# Altium PCB PCB_Montree_Going.PcbDoc
Units mm, origin at the board's own origin, x right, y up, seen from the top; angles counter-clockwise.
Board outline 70.1 x 70.99 mm, 2 copper layers (Top Layer, Bottom Layer); 43 components, 26 nets, 141 pads, 442 vias.
Unrouted connection lines stored in the file: 3.
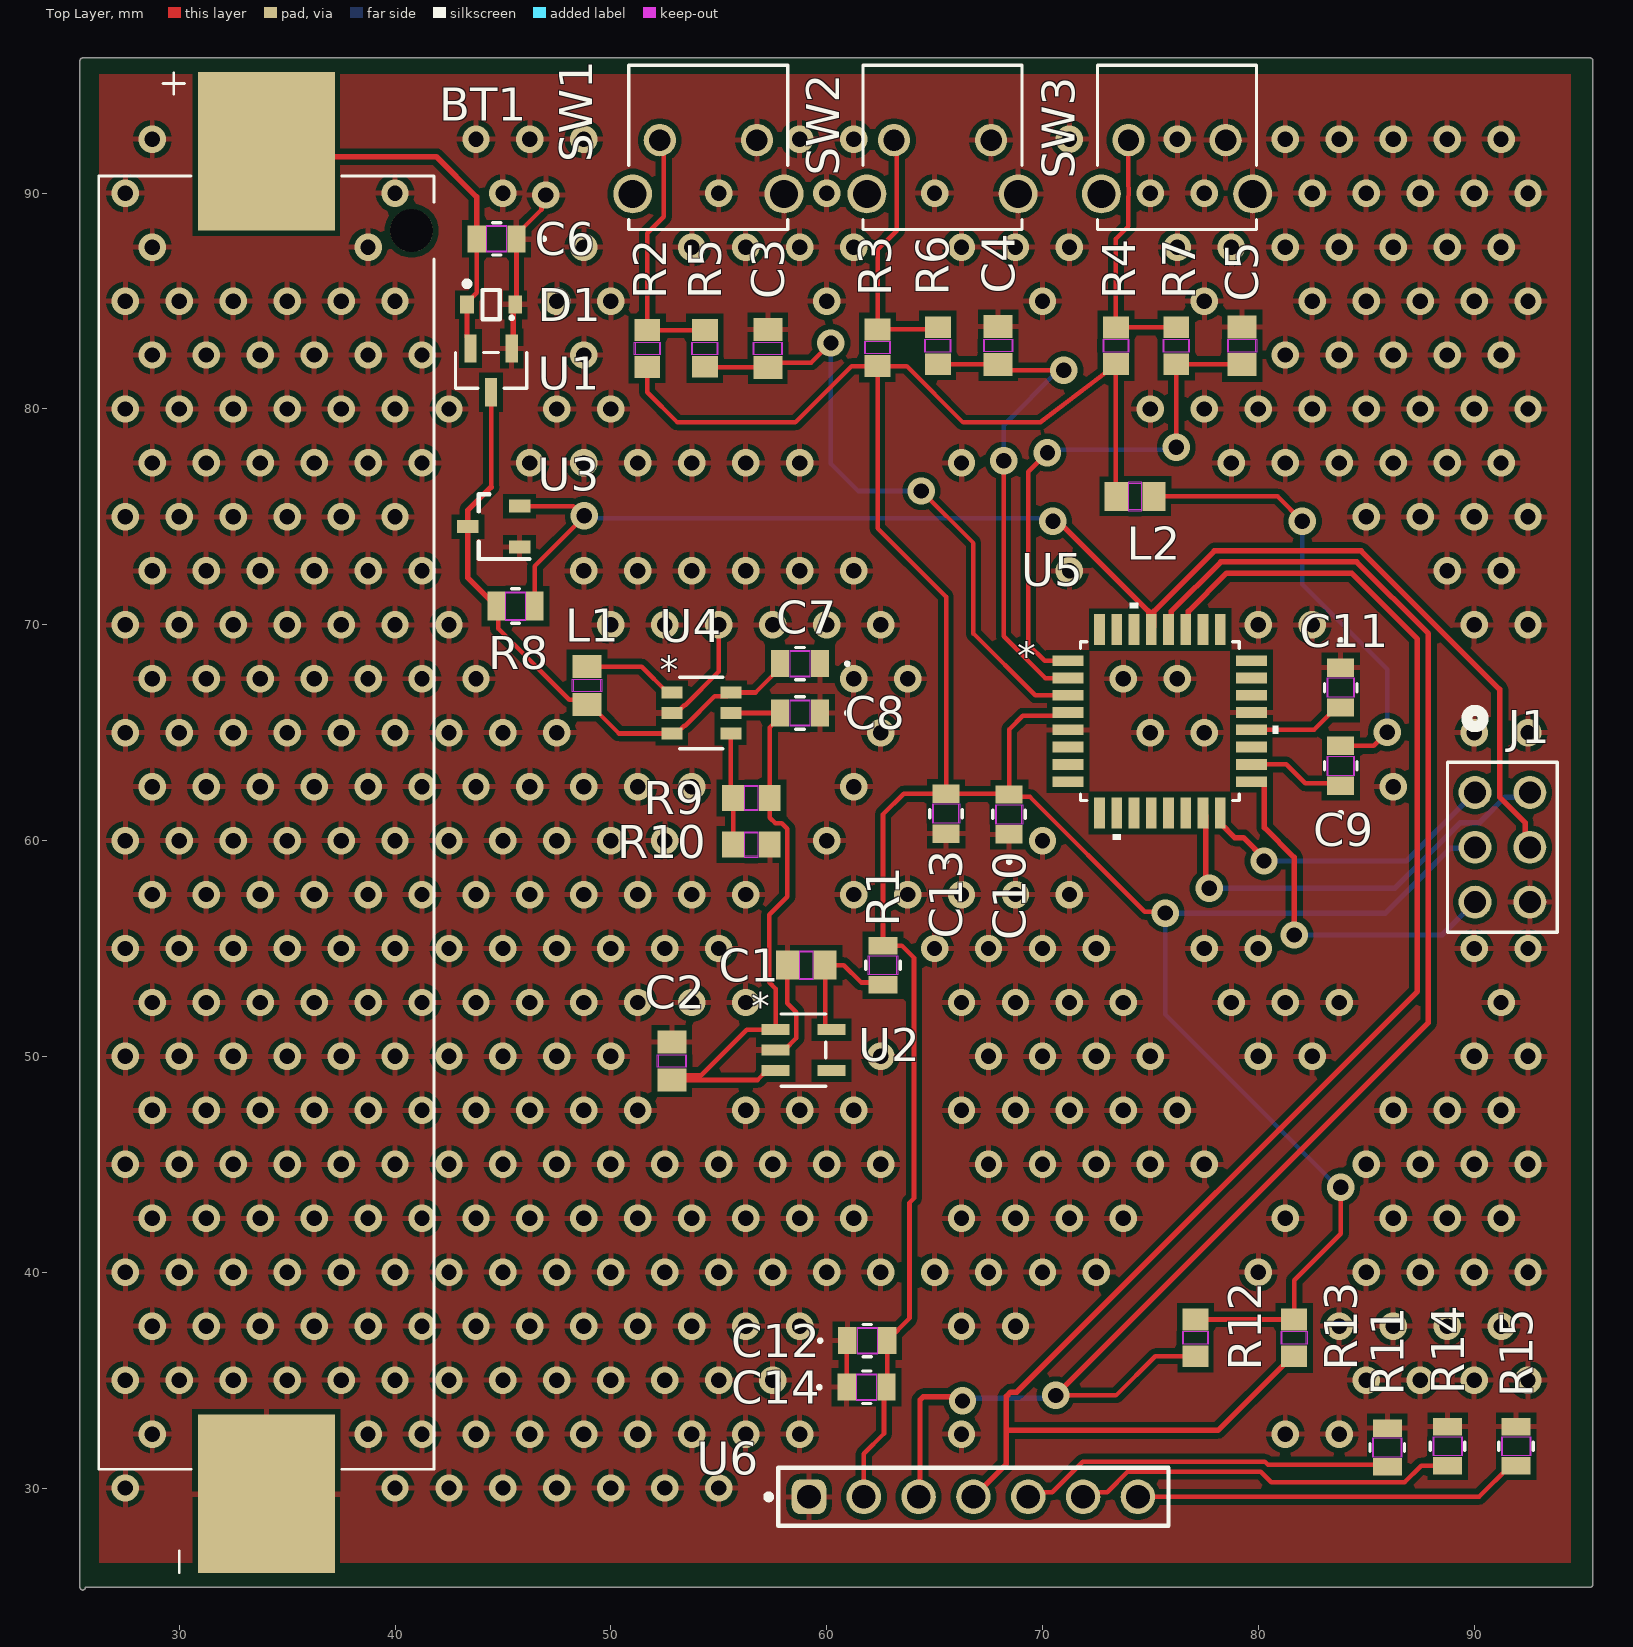
[diagram p0: Top Layer view]
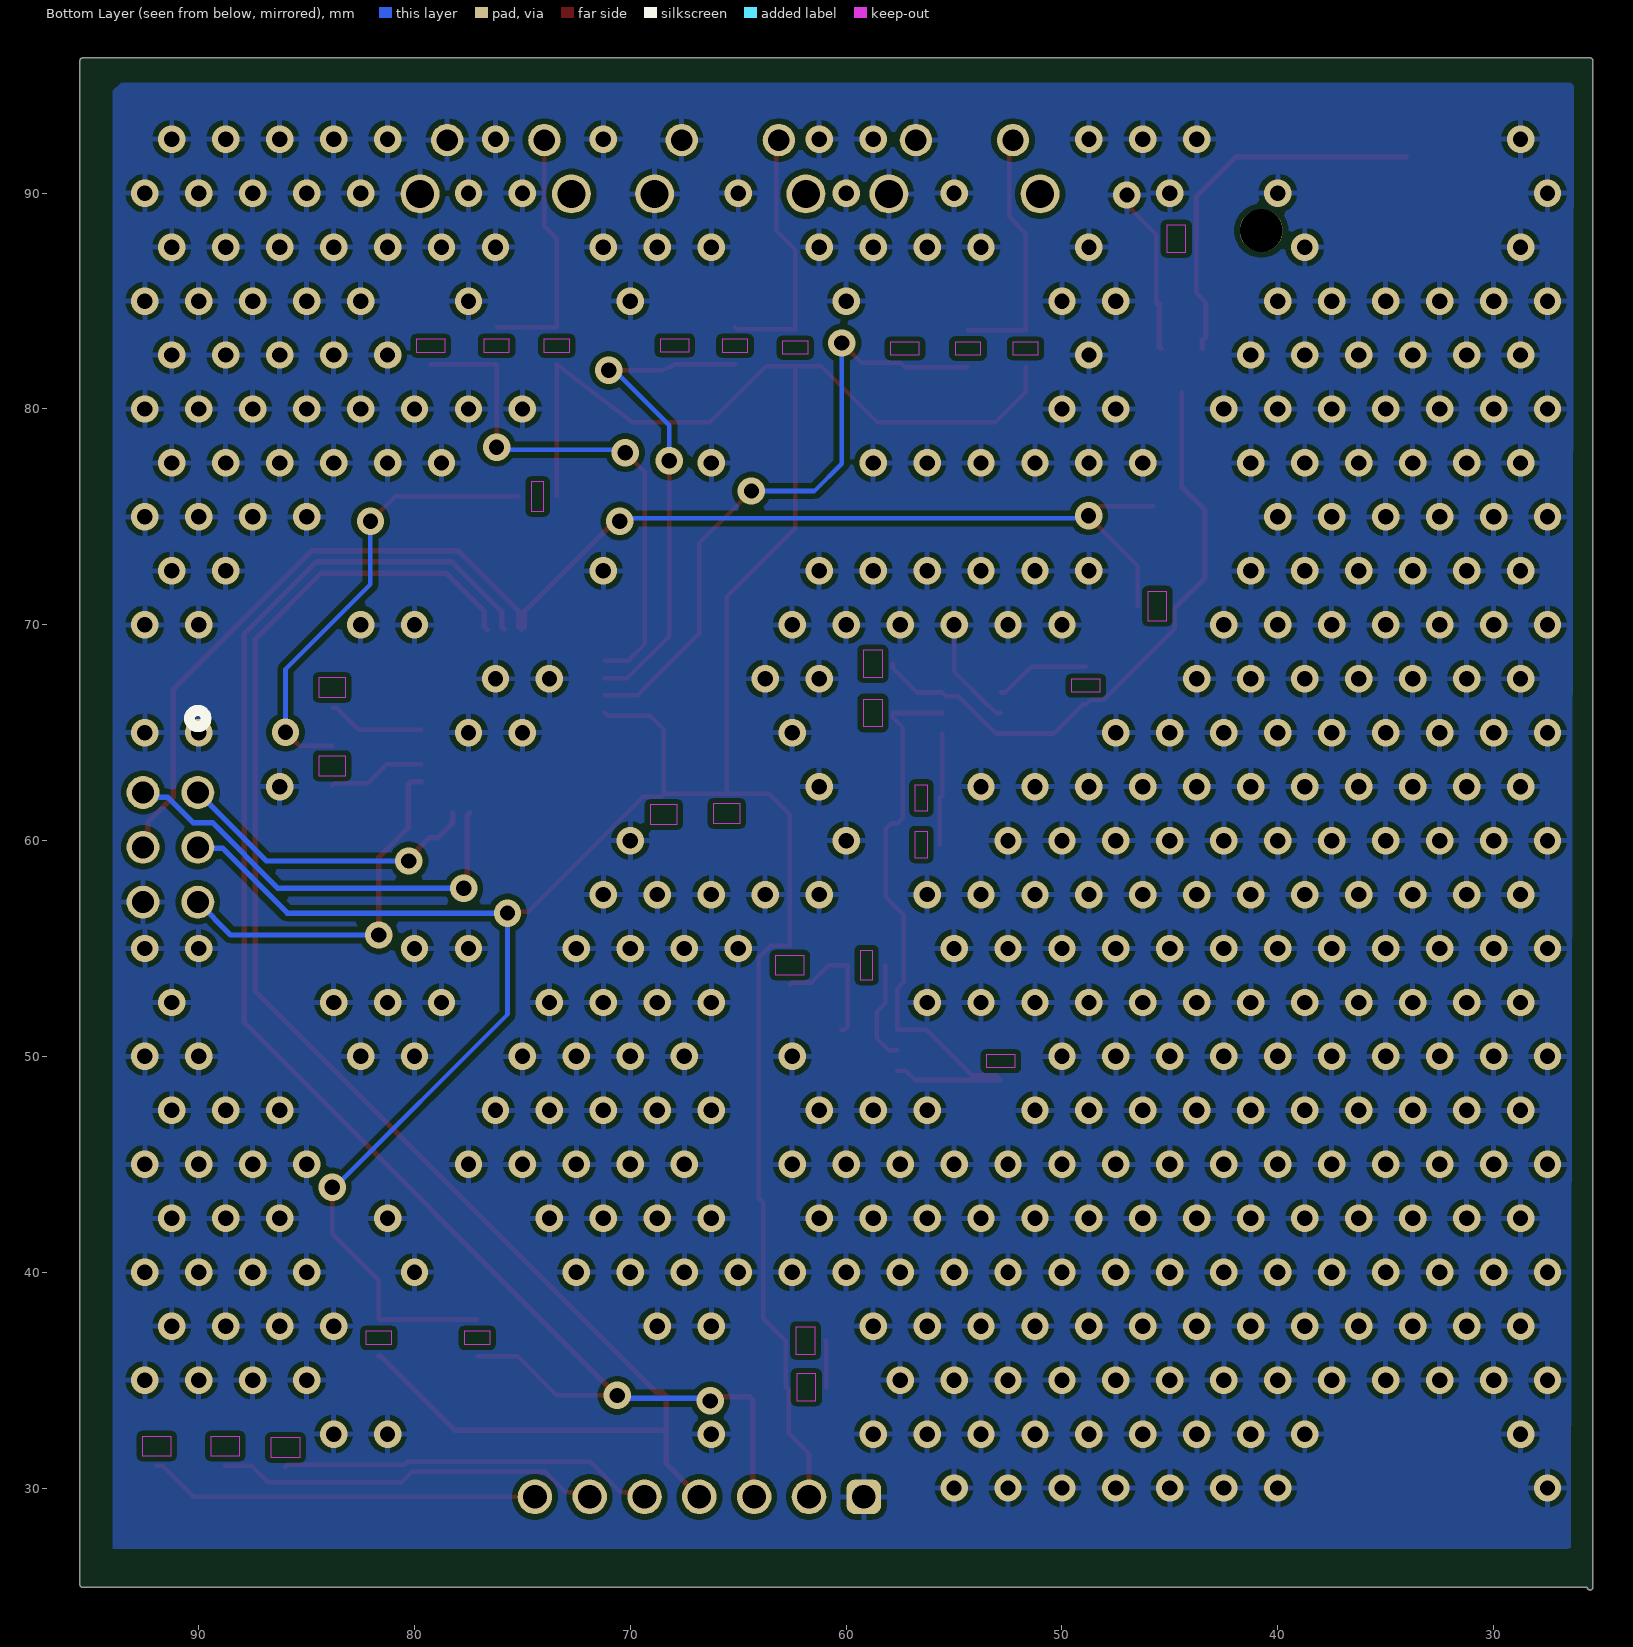
[diagram p1: Bottom Layer view, seen from below]
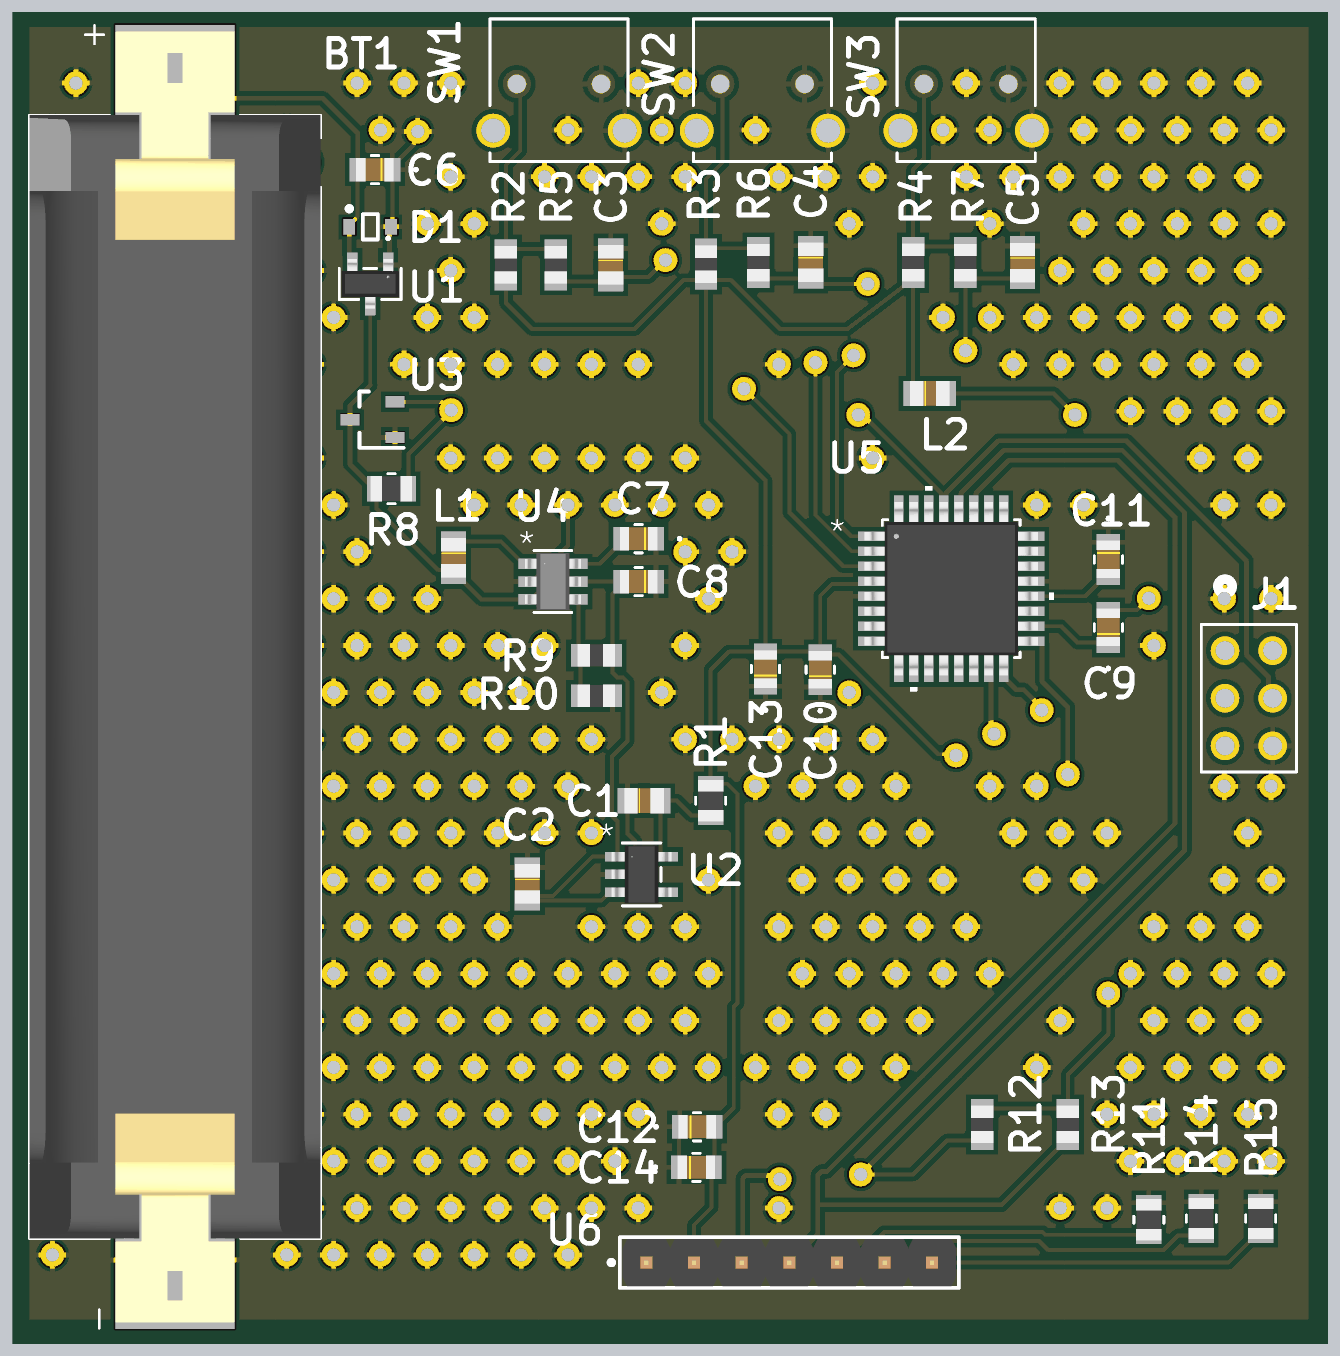
[diagram p2: 3D render of the assembled board from above, using the file's embedded part models]

## Layer stack, top to bottom
Top Solder: solder mask 0.0102, Solder Resist, Dk 3.5
Top Layer: signal copper 0.0356
Dielectric 1: dielectric 0.32, FR-4, Dk 4.8
Bottom Layer: signal copper 0.0356
Bottom Solder: solder mask 0.0102, Solder Resist, Dk 3.5

## Board outline
25.4,25.4 25.4,96.139 cw(c25.527,96.139) 25.527,96.266 95.377,96.266 cw(c95.377,96.139) 95.504,96.139 95.504,25.527 cw(c95.377,25.527) 95.377,25.4 25.654,25.4 cw(c25.527,25.4)

## Design rules (kind name [scope] priority, off if disabled: settings)
Clearance ClearanceExcludeKeepOut [IsPad vs IsKeepout] p1: gap=0 ignorepadtopadclearanceinfootprint=TRUE
Clearance [All] p2: gap=0.254 ignorepadtopadclearanceinfootprint=TRUE except(0.2: Arc-SMDPad Track-SMDPad SMDPad-SMDPad)
ComponentClearance [All] p1: gap=0.254 collisioncheckmode=3 verticalgap=0.254 showdistances=TRUE
DiffPairsRouting [All] p1: maxlimit=0.3 minlimit=0.3 mostfreqgap=0.3 toplayer_minwidth=0.381 toplayer_maxwidth=0.381 toplayer_prefwidth=0.381 bottomlayer_minwidth=0.381 bottomlayer_maxwidth=0.381 bottomlayer_prefwidth=0.381 maxuncoupledlength=12.7
MinimumSolderMaskSliver [All] p1: minsoldermaskwidth=0.045
PolygonConnect [All] p1: connectstyle=Relief reliefconductorwidth=0.254 reliefentries=4 polygonreliefangle="90 Angle" airgapwidth=0.254
RoutingVias [All] p1: holewidth=0.711 width=1.27 viastyle="Through Hole" minholewidth=0.711 minwidth=1.27 maxholewidth=0.711 maxwidth=1.27
SolderMaskExpansion [All] p1: expansion=0.102 istentingtop=FALSE
SupplyNets "Schematic Supply Nets_1" [InNet('GND')] p1: voltage=0.000
SupplyNets "Schematic Supply Nets_4" [InNet('3.6V')] p2: voltage=0.000
SupplyNets "Schematic Supply Nets_3" [InNet('3.3V')] p3: voltage=0.000
SupplyNets "Schematic Supply Nets" [InNet('1.6V')] p4: voltage=0.000
Width [All] p1: maxlimit=0.354 minlimit=0.2 preferedwidth=0.21 minimp=50.000000 maximp=50.000000 favimp=50.000000
27 further rules are at their usual default settings.

## Components (designator, comment, footprint, x,y, rotation, side; value= is the part's Value field where it differs from the comment)
BT1 "1024" BAT_1024 34.036,60.833 r270 top
C1 "1uF" CAP_CL21B105KAFNNNE_SAM 59.055,54.229 r0 top
C2 "1uF" CAP_CL21B105KAFNNNE_SAM 52.832,49.784 r270 top
C3 "1uF" CAP_CL21B105KAFNNNE_SAM 57.277,82.804 r270 top
C4 "1uF" CAP_CL21B105KAFNNNE_SAM 67.945,82.944 r270 top
C5 "1uF" CAP_CL21B105KAFNNNE_SAM 79.248,82.931 r270 top
C6 "0.1uF" CAP_CL21_SAM 44.704,87.884 r180 top
C7 "10uF" CAP_CL21_SAM 58.765,68.199 r180 top
C8 "10uF" CAP_CL21_SAM 58.765,65.913 r180 top
C9 "0.1uF" CAP_CL21_SAM 83.82,63.464 r90 top
C10 "0.1uF" CAP_CL21_SAM 68.453,61.214 r90 top
C11 "0.1uF" CAP_CL21_SAM 83.82,67.092 r270 top
C12 "10uF" CAP_CL21_SAM 61.885,36.83 r0 top
C13 "0.1uF" CAP_CL21_SAM 65.532,61.25 r90 top
C14 "0.1uF" CAP_CL21_SAM 61.849,34.671 r0 top
D1 "MM3Z3V3T1G" ONSC-SOD-323-2-477-02_V 44.45,84.836 r0 top
J1 "67997-206HLF" 6Pins_AMP 90.043,62.23 r270 top
L1 "Inductor" CAP_CL21B105KAFNNNE_SAM 48.895,67.183 r270 top value=2.2uH
L2 "Inductor" CAP_CL21B105KAFNNNE_SAM 74.295,75.946 r0 top value=10uH
R1 "0" STA_RMCF0805_STP 62.611,54.229 r90 top
R2 "10k" RC0805N_YAG 51.689,82.804 r90 top
R3 "10k" RC0805N_YAG 62.357,82.842 r90 top
R4 "10k" RC0805N_YAG 73.406,82.931 r90 top
R5 "5k" RC0805N_VIS 54.356,82.804 r90 top
R6 "5k" RC0805N_VIS 65.151,82.931 r90 top
R7 "5k" RC0805N_VIS 76.2,82.931 r90 top
R8 "0" STA_RMCF0805_STP 45.582,70.866 r0 top
R9 "70k" RC0805N_VIS 56.515,61.976 r180 top
R10 "50k" RC0805N_VIS 56.515,59.817 r0 top
R11 "0" STA_RMCF0805_STP 85.979,31.877 r90 top
R12 "4.7k" RC0805N_VIS 77.089,36.957 r270 top
R13 "4.7k" RC0805N_VIS 81.661,36.957 r270 top
R14 "0" STA_RMCF0805_STP 88.773,31.941 r90 top
R15 "0" STA_RMCF0805_STP 91.948,31.941 r90 top
SW1 "1-1825027-7" SW2_1825027-F_TEC 56.769,92.456 r180 top
SW2 "1-1825027-7" SW2_1825027-F_TEC 67.619,92.456 r180 top
SW3 "1-1825027-7" SW2_1825027-F_TEC 78.486,92.456 r180 top
U1 "NTR4101PT1G" SOT-23-3_1P4X3P040_ONS 44.45,81.788 r180 top
U2 "MIC5504-3.3YM5-TR" SOT-23-5_MC_MCH 58.928,50.292 r0 top
U3 "TPS3839G12DBZR" DBZ0003A_N 44.577,74.549 r180 top
U4 "TLV61070ADBVR" SOT-23-6_DBV_TEX 54.194,65.913 r0 top
U5 "ATMEGA328PB-AU" 32A_MCH 75.438,65.532 r0 top
U6 "" 61300711121 66.802,29.591 r0 top

## Footprints (in the part's own frame and the unit in brackets; to place one, negate y for a bottom-side part, rotate by r counter-clockwise, add the part's x,y. Pads: shape width x height; smd on the part's side, far side on the other; paste and mask are expansions set on the pad)
6Pins_AMP [mil]
  round 60 hole 40 paste-99999 mask+0: 1(0,0) 2(100,0) 3(200,0) 4(0,100) 5(100,100) 6(200,100)
  silkscreen extent -150,-50 255,150
32A_MCH [mm]
  rect 1.45x0.5 smd paste+0 mask+0: 1(-4.25,2.8) 2(-4.25,2) 3(-4.25,1.2) 4(-4.25,0.4) 5(-4.25,-0.4) 6(-4.25,-1.2) 7(-4.25,-2) 8(-4.25,-2.8) 17(4.25,-2.8) 18(4.25,-2) 19(4.25,-1.2) 20(4.25,-0.4) 21(4.25,0.4) 22(4.25,1.2) 23(4.25,2) 24(4.25,2.8)
  rect 0.5x1.45 smd paste+0 mask+0: 9(-2.8,-4.25) 10(-2,-4.25) 11(-1.2,-4.25) 12(-0.4,-4.25) 13(0.4,-4.25) 14(1.2,-4.25) 15(2,-4.25) 16(2.8,-4.25) 25(2.8,4.25) 26(2,4.25) 27(1.2,4.25) 28(0.4,4.25) 29(-0.4,4.25) 30(-1.2,4.25) 31(-2,4.25) 32(-2.8,4.25)
  silkscreen extent -3.68,-5.48 5.48,5.48, body extent -4.62,-4.62 4.62,4.62, height 1.2
61300711121 [mm] "Pin Header, pitch 2.54 mm, THT, Vertical, single row, 7p"
  rrect50% 1.6x1.6 hole 1.1: 1(-7.62,0)
  round 1.6 hole 1.1: 2(-5.08,0) 3(-2.54,0) 4(0,0) 5(2.54,0) 6(5.08,0) 7(7.62,0)
  silkscreen extent -9.61,-1.35 9.04,1.35, body extent -8.89,-1.27 8.89,1.27, height 8.57
BAT_1024 [mm]
  rect 7.34x6.35 smd: N(31.105,0) P(-31.105,0)
  round 1.98 hole 1.98 unplated: ""(-27.435,6.73)
  silkscreen extent -34.75,-7.77 34.75,7.77, body extent -34.43,-7.77 34.43,7.77, height 14.86
CAP_CL21_SAM [mm]
  rect 0.85x1.25 smd paste+0 mask+0: 1(-0.925,0) 2(0.925,0)
  Top Layer keep-out region: -0.449,-0.574 -0.449,0.574 0.449,0.574 0.449,-0.574
  Keep-Out Layer region: -0.449,-0.625 -0.449,0.625 0.449,0.625 0.449,-0.625
  silkscreen extent -2.26,-0.75 0.19,0.75, body extent -1,-0.63 1,0.63, height 1.35
CAP_CL21B105KAFNNNE_SAM [mil]
  rect 42x53 smd paste+0 mask+0: 1(-34.5,0) 2(34.5,0)
  Top Layer keep-out region: -11.5,-24.5 -11.5,24.5 11.5,24.5 11.5,-24.5
  Keep-Out Layer region: -11.5,-26.5 -11.5,26.5 11.5,26.5 11.5,-26.5
  body extent -41,-26 41,26, height 53
DBZ0003A_N [mm]
  rect 1x0.6 smd paste+0 mask+0.051: 1(-1.2,0.95) 2(-1.2,-0.95) 3(1.2,0)
  silkscreen extent -1.65,-1.5 0.7,1.5
ONSC-SOD-323-2-477-02_V [mm] "SOD, 2-Leads, Body 1.7x1.25mm"
  rect 0.63x0.83 smd: 1(-1.115,0) 2(1.115,0)
  silkscreen extent -1.24,-0.67 0.4,1.09, body extent -0.85,-0.63 0.85,0.63, height 1.06
RC0805N_VIS [mm]
  rect 1.006x1.2 smd paste+0 mask+0: 1(-0.853,0) 2(0.853,0)
  Top Layer keep-out region: -0.299,-0.549 -0.299,0.549 0.299,0.549 0.299,-0.549
  Keep-Out Layer region: -0.299,-0.6 -0.299,0.6 0.299,0.6 0.299,-0.6
  body extent -1,-0.6 1,0.6, height 0.71
RC0805N_YAG [mil]
  rect 40x47 smd paste+0 mask+0: 1(-33.5,0) 2(33.5,0)
  Top Layer keep-out region: -11.5,-21.5 -11.5,21.5 11.5,21.5 11.5,-21.5
  Keep-Out Layer region: -11.5,-23.5 -11.5,23.5 11.5,23.5 11.5,-23.5
  body extent -39,-24 39,24, height 28
SOT-23-3_1P4X3P040_ONS [mil]
  rect 22.36x51.56 smd paste+0 mask+0: 1(-37.5,-40) 2(37.5,-40) 3(0,40)
  silkscreen extent -65,-99 65,33, body extent -60,-52 60,52, height 44
SOT-23-5_MC_MCH [mil]
  rect 51.56x20 smd paste+0 mask+0: 1(-51,37.4) 2(-51,0) 3(-51,-37.4) 4(51,-37.4) 5(51,37.4)
  silkscreen extent -40,-66 40,66, body extent -63,-61 63,61, height 57
SOT-23-6_DBV_TEX [mm]
  rect 0.972x0.558 smd paste+0 mask+0: 1(-1.362,0.95) 2(-1.362,0) 3(-1.362,-0.95) 4(1.362,-0.95) 5(1.362,0) 6(1.362,0.95)
  silkscreen extent -1,-1.65 1,1.65, body extent -1.5,-1.52 1.5,1.52, height 1.45
STA_RMCF0805_STP [mil]
  rect 31.87x53 smd paste+0 mask+0: 1(-35.44,0) 2(35.44,0)
  Top Layer keep-out region: -17.5,-24.5 -17.5,24.5 17.5,24.5 17.5,-24.5
  Keep-Out Layer region: -17.5,-26.5 -17.5,26.5 17.5,26.5 17.5,-26.5
  silkscreen extent -7,-32 7,32, body extent -44,-26 44,26, height 26
SW2_1825027-F_TEC [mil]
  round 59 / inner round 60 / far side round 59 hole 39 paste-99999 mask-29.5: 1(0,0) 2(177.17,0)
  round 71 / inner round 60 / far side round 71 hole 51 paste-99999 mask+0: 3(-49.41,98.04) 4(226.58,98.04)
  silkscreen extent -56,-137 234,163

## Part data
BT1: "SMT Holder for AA Battery", Package=None, Check_prices=https://www.snapeda.com/parts/1024/Keystone/view-part/?ref=eda, MF="Keystone Electronics", MP=1024, SnapEDA_Link=https://www.snapeda.com/parts/1024/Keystone/view-part/?ref=snap
C1 C2 C3 C4 C5: library part CL21B105KAFNNNE, "Description", Manufacturer_Name=Samsung, Copyright="Copyright (C) 2025 Ultra Librarian. All rights reserved.", Manufacturer_Part_Number=CL21B105KAFNNNE
C6 C9 C10 C11 C13 C14: library part CL21B104KBCNNNC, "Description", Manufacturer_Name=Samsung, Copyright="Copyright (C) 2026 Ultra Librarian. All rights reserved.", Manufacturer_Part_Number=CL21B104KBCNNNC
C7 C8 C12: library part CL21A106KQFNNNE, "Description", Manufacturer_Name=Samsung, Copyright="Copyright (C) 2026 Ultra Librarian. All rights reserved.", Manufacturer_Part_Number=CL21A106KQFNNNE
D1: library part CMP-1060-00672-1, "Zener Voltage Regulator, 300 mW, 2-Pin SOD-323, Pb-Free, Tape and Reel", Manufacturer="On Semiconductor", ComponentLink1Description="Manufacturer URL", ComponentLink1URL=http://www.onsemi.com/, ComponentLink2Description=Datasheet, ComponentLink2URL=http://www.onsemi.cn/pub_link/Collateral/MM3Z2V4T1-D.PDF, ComponentLink3Description="Package Specification", ComponentLink3URL=http://www.onsemi.com/pub_link/Collateral/477-02.PDF.1, DatasheetVersion="Rev. 9", Mounting Technology="Surface Mount", P Max (W)=0.3, PackageDescription="2-Pin SOD, Body 1.7 x 1.25 mm", PackageReference=SOD-323-2-477-02, PackageVersion="Rev. H, 03/2007", Packing="Tape and Reel", PartNumber=MM3Z3V3T1G, RoHS=Pb-Free, VZ Typ (V)=3.3
J1: "Description", Manufacturer_Name="Amphenol ICC", Copyright="Copyright (C) 2026 Ultra Librarian. All rights reserved.", Manufacturer_Part_Number=67997-206HLF, RefDes=RefDes, Type=Type
R1 R8 R11 R14 R15: library part RMCF0805ZT0R00, "Description", Manufacturer_Name="Stackpole International", Copyright="Copyright (C) 2026 Ultra Librarian. All rights reserved.", Manufacturer_Part_Number=RMCF0805ZT0R00
R2 R3 R4: library part RC0805FR-0710KL, "Description", Manufacturer_Name=Yageo, Copyright="Copyright (C) 2025 Ultra Librarian. All rights reserved.", Manufacturer_Part_Number=RC0805FR-0710KL
R5 R6 R7 R9 R10 R12 R13: library part CRCW080569K8FKEA, "D12/CRCW0805 100 69K8 1% ET1 e3", Manufacturer_Name=Vishay, Copyright="Copyright (C) 2026 Ultra Librarian. All rights reserved.", Manufacturer_Part_Number=CRCW080569K8FKEA
SW1 SW2 SW3: "FSMRA6JH04=R/A,TACT PB SW,160G", Manufacturer_Name="TE Connectivity", Copyright="Copyright (C) 2025 Ultra Librarian. All rights reserved.", Manufacturer_Part_Number=1-1825027-7
U1: "Description", Manufacturer_Name=onsemi, Copyright="Copyright (C) 2025 Ultra Librarian. All rights reserved.", Manufacturer_Part_Number=NTR4101PT1G, RefDes=RefDes, Type=Type
U2 U5: "Description", Manufacturer_Name=Microchip, Copyright="Copyright (C) 2025 Ultra Librarian. All rights reserved.", RefDes=RefDes, Type=Type
  U2: Manufacturer_Part_Number=MIC5504-3.3YM5-TR
  U5: Manufacturer_Part_Number=ATMEGA328PB-AU
U3: "Ultra-low power, supply voltage supervisor 3-SOT-23 -40 to 85", Manufacturer_Name="Texas Instruments", Copyright="Copyright (C) 2026 Ultra Librarian. All rights reserved.", Datasheet=https://www.ti.com/lit/gpn/tps3839, Digi-Key_Part_Number_1=296-40759-1-ND, Digi-Key_Part_Number_2=296-40759-2-ND, Digi-Key_Part_Number_3=296-40759-6-ND, Digi-Key_Part_Number_4=TPS3839G12DBZR-ND, Digi-Key_Part_Number_5=2156-TPS3839G12DBZR-ND, Manufacturer_Part_Number=TPS3839G12DBZR, RefDes=RefDes, Type=TYPE
U4: "5-V 2-A boost converter with 0.5-V minimum input voltage 6-SOT-23 -40 to 125", Manufacturer_Name="Texas Instruments", Copyright="Copyright (C) 2025 Ultra Librarian. All rights reserved.", Manufacturer_Part_Number=TLV61070ADBVR, RefDes=RefDes, Type=Type
U6: library part Component_1
L1 L2: Code_IEC=1005, Code_JEITA=0402, LatestRevisionDate=29-May-2009, LatestRevisionNote="IPC-7351 Footprint Added.", PackageDescription="Chip Inductor", PackageReference=0402-A, Published=8-Jun-2000, Publisher="Altium Limited"

## Via types
v1: diameter 1.27, hole 0.711, Top Layer to Bottom Layer, 442 vias

## Nets (pads, with @x,y where several pads share a name; then routed paths per layer and width w, separated by ;. In a path a pad name is that pad's centre, name@x,y a point inside that pad or via, vN(x,y) a via of type N, cw(c..) or ccw(c..) an arc to the next point about the centre after c; other vN are vias at no path point)
1.6V: C7.2 L1.2 R8.1 U1.3 U3.3 U4.3 U4.6 | length 28.5
  Top Layer w0.21: 44.45,76.384 U1.3 ; R8.1 44.778,70.769 44.778,69.827 48.073,66.532 48.67,66.532 L1.2 49.035,66.307 50.378,64.963 U4.3 53.039,64.963 53.405,65.329 53.444,65.329 54.804,66.689 55.383,66.689 U4.6 56.704,66.863 57.84,67.999 C7.2
  Top Layer w0.254: 44.45,76.384 43.377,75.311 U3.3 43.377,72.171 R8.1
3.3V: C10.2 C12.2 C13.2 C14.2 J1.2 L2.1 R1.2 R2.1 R3.1 R4.1 R12.1 R13.1 U5.4 U6.2 | length 152.7
  Top Layer w0.21: R2.1 51.689,80.772 53.086,79.375 58.547,79.375 61.163,81.991 R3.1 ; U6.2 61.722,31.591 62.657,32.527 62.657,34.554 C14.2 62.81,34.707 C12.2 63.839,37.86 63.839,43.223 64.048,43.432 64.048,54.57 63.489,55.129 R1.2 62.611,61.214 63.572,62.175 C13.2 ; C10.2@68.453,62.175 68.453,65.151 69.089,65.787 71.043,65.787 U5.4 ; L2.1 73.406,75.959 R4.1 72.914,81.677 69.89,79.375 66.32,79.375 63.704,81.991 R3.1 ; v1(75.692,56.642) 75.631,56.703 74.742,56.703 69.423,62.022 68.57,62.022 C10.2 68.417,62.175 C13.2 ; R12.1 R13.1 81.661,39.624 83.82,41.783 v1(83.82,43.942) ; R3.1 62.357,74.478 65.532,71.303 C13.2
  Bottom Layer w0.21: v1(75.692,56.642) 75.692,51.943 83.693,43.942 v1(83.82,43.942)
  Bottom Layer w0.254: v1(75.692,56.642) 85.892,56.642 88.9,59.65 89.872,59.65 89.938,59.585 J1.2
3.6V: C2.2 C8.2 R9.1 U2.1 U2.3 U4.5 | length 28.9
  Top Layer w0.21: U4.5 C8.2 57.84,65.713 57.368,65.241 R9.1 57.368,61.061 57.627,60.802 57.917,60.802 58.176,60.543 58.176,57.404 57.34,56.569 57.34,53.43 57.633,53.137 U2.1 56.296,51.242 54.187,49.133 53.057,49.133 C2.2 56.798,48.908 57.232,49.342 U2.3
Bouton_1: C3.2 R5.1 U5.3 | length 29.8
  Top Layer w0.21: R5.1 54.38,81.928 C3.2 57.502,82.153 59.293,82.153 v1(60.198,83.058) ; v1(64.389,76.2) 66.802,73.787 66.802,69.596 69.666,66.732 U5.3
  Bottom Layer w0.21: v1(60.198,83.058) 60.198,77.47 61.468,76.2 v1(64.389,76.2)
Bouton_2: C4.2 R6.1 U5.2 | length 23.3
  Top Layer w0.21: R6.1 67.934,82.078 C4.2 68.513,81.788 v1(70.993,81.788) ; v1(68.199,77.597) 68.199,69.469 70.136,67.532 U5.2
  Bottom Layer w0.21: v1(68.199,77.597) 68.199,79.248 70.739,81.788 v1(70.993,81.788)
Bouton_3: C5.2 R7.1 U5.1 | length 24.4
  Top Layer w0.21: v1(70.231,77.978) 69.342,77.089 69.342,69.088 70.098,68.332 U5.1 ; v1(76.2,78.232) R7.1 79.224,82.078 C5.2
  Bottom Layer w0.21: v1(70.231,77.978) 70.358,78.105 76.073,78.105 v1(76.2,78.232)
GND: BT1.N C1.1 C2.1 C3.1 C4.1 C5.1 C6.1 C7.1 C8.1 C10.1 C11.1 C12.1 C13.1 C14.1 D1.2 J1.6 R10.2 R11.2 R14.2 R15.2 SW1.1 SW1.3 SW2.1 SW2.3 SW3.1 SW3.3 U1.1 U2.2 U3.1 U4.2 U5.5 U5.21 U6.1 | length 19.8
  Top Layer w0.21: D1.2 45.629,84.9 45.629,88.084 46.787,89.242 46.787,89.713 v1(46.99,89.916) ; U4.2 53.039,65.913 53.405,66.279 53.444,66.279 55,67.835 v1(55,70) ; U2.2 58.033,50.292 58.592,50.851 58.592,52.054 58.179,52.468 C1.1 ; C14.1 60.924,36.794 C12.1
  Top Layer w0.254: U1.1 45.484,82.885 D1.2@45.484,84.882
  other v1: 27.5,30 40,30 42.5,30 45,30 47.5,30 50,30 52.5,30 55,30 28.75,32.5 38.75,32.5 41.25,32.5 43.75,32.5 46.25,32.5 48.75,32.5 51.25,32.5 53.75,32.5 56.25,32.5 58.75,32.5 66.25,32.5 81.25,32.5 83.75,32.5 27.5,35 30,35 32.5,35 35,35 37.5,35 40,35 42.5,35 45,35 47.5,35 50,35 52.5,35 55,35 57.5,35 85,35 87.5,35 90,35 92.5,35 28.75,37.5 31.25,37.5 33.75,37.5 36.25,37.5 38.75,37.5 41.25,37.5 43.75,37.5 46.25,37.5 48.75,37.5 51.25,37.5 53.75,37.5 56.25,37.5 58.75,37.5 66.25,37.5 68.75,37.5 83.75,37.5 86.25,37.5 88.75,37.5 91.25,37.5 27.5,40 30,40 32.5,40 35,40 37.5,40 40,40 42.5,40 45,40 47.5,40 50,40 52.5,40 55,40 57.5,40 60,40 62.5,40 65,40 67.5,40 70,40 72.5,40 80,40 85,40 87.5,40 90,40 92.5,40 28.75,42.5 31.25,42.5 33.75,42.5 36.25,42.5 38.75,42.5 41.25,42.5 43.75,42.5 46.25,42.5 48.75,42.5 51.25,42.5 53.75,42.5 56.25,42.5 58.75,42.5 61.25,42.5 66.25,42.5 68.75,42.5 71.25,42.5 73.75,42.5 81.25,42.5 86.25,42.5 88.75,42.5 91.25,42.5 27.5,45 30,45 32.5,45 35,45 37.5,45 40,45 42.5,45 45,45 47.5,45 50,45 52.5,45 55,45 57.5,45 60,45 62.5,45 67.5,45 70,45 72.5,45 75,45 77.5,45 85,45 87.5,45 90,45 92.5,45 28.75,47.5 31.25,47.5 33.75,47.5 36.25,47.5 38.75,47.5 41.25,47.5 43.75,47.5 46.25,47.5 48.75,47.5 51.25,47.5 56.25,47.5 58.75,47.5 61.25,47.5 66.25,47.5 68.75,47.5 71.25,47.5 73.75,47.5 76.25,47.5 86.25,47.5 88.75,47.5 91.25,47.5 27.5,50 30,50 32.5,50 35,50 37.5,50 40,50 42.5,50 45,50 47.5,50 50,50 62.5,50 67.5,50 70,50 72.5,50 75,50 80,50 82.5,50 90,50 92.5,50 28.75,52.5 31.25,52.5 33.75,52.5 36.25,52.5 38.75,52.5 41.25,52.5 43.75,52.5 46.25,52.5 48.75,52.5 51.25,52.5 53.75,52.5 56.25,52.5 66.25,52.5 68.75,52.5 71.25,52.5 73.75,52.5 78.75,52.5 81.25,52.5 83.75,52.5 91.25,52.5 27.5,55 30,55 32.5,55 35,55 37.5,55 40,55 42.5,55 45,55 47.5,55 50,55 52.5,55 55,55 65,55 67.5,55 70,55 72.5,55 77.5,55 80,55 90,55 92.5,55 28.75,57.5 31.25,57.5 33.75,57.5 36.25,57.5 38.75,57.5 41.25,57.5 43.75,57.5 46.25,57.5 48.75,57.5 51.25,57.5 53.75,57.5 56.25,57.5 61.25,57.5 63.75,57.5 66.25,57.5 68.75,57.5 71.25,57.5 27.5,60 30,60 32.5,60 35,60 37.5,60 40,60 42.5,60 45,60 47.5,60 50,60 52.5,60 60,60 70,60 28.75,62.5 31.25,62.5 33.75,62.5 36.25,62.5 38.75,62.5 41.25,62.5 43.75,62.5 46.25,62.5 48.75,62.5 51.25,62.5 53.75,62.5 61.25,62.5 86.25,62.5 27.5,65 30,65 32.5,65 35,65 37.5,65 40,65 42.5,65 45,65 47.5,65 62.5,65 75,65 77.5,65 90,65 92.5,65 28.75,67.5 31.25,67.5 33.75,67.5 36.25,67.5 38.75,67.5 41.25,67.5 43.75,67.5 61.25,67.5 63.75,67.5 73.75,67.5 76.25,67.5 27.5,70 30,70 32.5,70 35,70 37.5,70 40,70 42.5,70 50,70 52.5,70 57.5,70 60,70 62.5,70 80,70 82.5,70 90,70 92.5,70 28.75,72.5 31.25,72.5 33.75,72.5 36.25,72.5 38.75,72.5 41.25,72.5 48.75,72.5 51.25,72.5 53.75,72.5 56.25,72.5 58.75,72.5 61.25,72.5 71.25,72.5 88.75,72.5 91.25,72.5 27.5,75 30,75 32.5,75 35,75 37.5,75 40,75 85,75 87.5,75 90,75 92.5,75 28.75,77.5 31.25,77.5 33.75,77.5 36.25,77.5 38.75,77.5 41.25,77.5 46.25,77.5 48.75,77.5 51.25,77.5 53.75,77.5 56.25,77.5 58.75,77.5 66.25,77.5 78.75,77.5 81.25,77.5 83.75,77.5 86.25,77.5 88.75,77.5 91.25,77.5 27.5,80 30,80 32.5,80 35,80 37.5,80 40,80 42.5,80 47.5,80 50,80 75,80 77.5,80 80,80 82.5,80 85,80 87.5,80 90,80 92.5,80 28.75,82.5 31.25,82.5 33.75,82.5 36.25,82.5 38.75,82.5 41.25,82.5 48.75,82.5 81.25,82.5 83.75,82.5 86.25,82.5 88.75,82.5 91.25,82.5 27.5,85 30,85 32.5,85 35,85 37.5,85 40,85 47.5,85 50,85 60,85 70,85 77.5,85 82.5,85 85,85 87.5,85 90,85 92.5,85 28.75,87.5 38.75,87.5 48.75,87.5 53.75,87.5 56.25,87.5 58.75,87.5 61.25,87.5 66.25,87.5 68.75,87.5 71.25,87.5 76.25,87.5 78.75,87.5 81.25,87.5 83.75,87.5 86.25,87.5 88.75,87.5 91.25,87.5 27.5,90 40,90 45,90 55,90 60,90 65,90 75,90 77.5,90 82.5,90 85,90 87.5,90 90,90 92.5,90 28.75,92.5 43.75,92.5 46.25,92.5 48.75,92.5 58.75,92.5 61.25,92.5 71.25,92.5 76.25,92.5 81.25,92.5 83.75,92.5 86.25,92.5 88.75,92.5 91.25,92.5
MISO: J1.1 U5.16 | length 14.4
  Top Layer w0.254: U5.16 78.238,60.807 78.907,60.138 79.308,60.138 80.264,59.182 v1(80.264,59.055)
  Bottom Layer w0.254: v1(80.264,59.055) 86.868,59.055 J1.1
MOSI: J1.4 U5.15 | length 20.3
  Top Layer w0.254: U5.15 77.561,61.159 77.561,57.948 v1(77.724,57.785)
  Bottom Layer w0.254: v1(77.724,57.785) 86.316,57.785 89.364,60.833 90.262,60.833 91.44,62.011 92.364,62.011 J1.4
NetBT1_P: BT1.P C6.2 D1.1 U1.2 | length 17.8
  Top Layer w0.21: D1.1 43.335,84.936 43.779,85.38 C6.2
  Top Layer w0.254: BT1.P@34.036,91.694 41.91,91.694 43.779,89.825 C6.2 ; D1.1 43.335,83.337 43.497,83.175 U1.2
NetC1_2: C1.2 R1.1 U2.5 | length 6.2
  Top Layer w0.21: U2.5 60.08,51.242 59.931,51.391 C1.2 60.8,54.229 61.603,53.425 62.514,53.425 R1.1
NetC9_1: C9.1 U5.18 | length 4.5
  Top Layer w0.21: U5.18 81.293,63.532 82.17,62.656 83.703,62.656 C9.1
NetC9_2: C9.2 L2.2 | length 21.2
  Top Layer w0.21: L2.2 80.899,75.946 v1(82.042,74.803) ; C9.2 85.344,64.389 v1(85.979,65.024)
  Bottom Layer w0.21: v1(82.042,74.803) 82.042,71.882 85.979,67.945 v1(85.979,65.024)
NetC11_2: C11.2 U5.20 | length 4.6
  Top Layer w0.21: U5.20 82.585,65.132 83.62,66.167 C11.2
NetL1_1: L1.1 U4.1 | length 4.4
  Top Layer w0.21: L1.1 51.429,68.059 52.625,66.863 U4.1
NetR2_2: R2.2 R5.2 SW1.2 | length 11.9
  Top Layer w0.21: SW1.2 52.451,92.274 52.451,88.9 51.689,88.138 R2.2 54.354,83.655 R5.2
NetR3_2: R3.2 R6.2 SW2.2 | length 12
  Top Layer w0.21: SW2.2 63.246,92.329 63.246,88.265 62.357,87.376 R3.2 65.06,83.693 R6.2
NetR4_2: R4.2 R7.2 SW3.2 | length 11.7
  Top Layer w0.21: SW3.2 73.986,90.595 73.992,89.977 cw(c72.731,89.966) 73.986,89.846 73.986,88.464 73.406,87.884 R4.2 76.198,83.782 R7.2
NetR9_2: R9.2 R10.1 U4.4 | length 5.2
  Top Layer w0.21: U4.4 55.557,62.081 R9.2 R10.1
NetR11_1: R11.1 U6.5 | length 17.4
  Top Layer w0.21: U6.5 69.556,29.805 70.457,29.805 71.866,31.214 80.311,31.214 80.451,31.073 85.882,31.073 R11.1
NetR14_1: R14.1 U6.6 | length 17.9
  Top Layer w0.21: U6.6 72.096,29.805 72.997,29.805 73.942,30.75 80.119,30.75 80.602,30.267 86.778,30.267 87.552,31.04 R14.1
NetR15_1: R15.1 U6.7 | length 18.1
  Top Layer w0.21: U6.7 90.23,29.591 91.68,31.04 R15.1
RESET: J1.5 R8.2 U3.2 U5.29 | length 65.8
  Top Layer w0.21: U3.2 48.259,75.499 48.759,74.999 46.482,72.722 R8.2
  Top Layer w0.254: v1@70.535,74.999 74.915,70.619 74.915,69.905 U5.29 75.161,69.905 75.161,70.619 77.97,73.428 84.771,73.428 91.186,67.012 91.186,62.011 92.364,60.833 92.364,59.909 J1.5
  Bottom Layer w0.21: v1(48.768,75.057) 48.895,74.93 70.358,74.93 v1(70.485,74.803)
SCK: J1.3 U5.17 | length 17.2
  Top Layer w0.254: U5.17 80.163,62.732 80.286,62.609 80.286,60.597 81.661,59.222 v1(81.661,55.626)
  Bottom Layer w0.254: v1(81.661,55.626) 88.519,55.626 J1.3
SCL: R12.2 U5.28 U6.3 | length 75.9
  Top Layer w0.21: v1(70.612,34.29) 73.406,34.29 75.22,36.104 R12.2
  Top Layer w0.254: U6.3 64.325,29.654 64.325,34.08 64.474,34.229 66.101,34.229 v1(66.294,34.036) ; v1(70.612,34.29) 87.884,51.562 87.884,69.596 84.56,72.92 78.262,72.92 75.961,70.619 75.961,69.905 U5.28
  Bottom Layer w0.254: v1(66.294,34.036) 66.421,34.163 70.485,34.163 v1(70.612,34.29)
SDA: R13.2 U5.27 U6.4 | length 76.7
  Top Layer w0.254: U6.4 68.326,31.115 68.326,32.672 ; U5.27 76.761,69.905 76.761,70.619 78.532,72.39 84.328,72.39 87.376,69.342 87.376,53.015 68.809,34.448 68.524,34.448 68.326,34.25 68.326,32.672 ; R13.2 81.564,36.104 78.132,32.672 68.326,32.672
pads on no net: BT1. SW1.4 SW2.4 SW3.4 U2.4 U5.6 U5.7 U5.8 U5.9 U5.10 U5.11 U5.12 U5.13 U5.14 U5.19 U5.22 U5.23 U5.24 U5.25 U5.26 U5.30 U5.31 U5.32

## Polygon pours and split planes (outlines as drawn)
GND on Bottom Layer "GND_L02_P005" (solid, pour order 5): 26.289,95.123 93.599,95.123 93.98,94.742 93.98,27.178 26.543,27.178 26.416,27.051
GND on Top Layer "GND_L01_P004" (solid, pour order 4): 94.488,95.504 26.289,95.504 26.289,26.543 94.488,26.543

## Silkscreen, mask and mechanical layers (free items; w line width, h text height)
Mechanical 1:
  lines w1.2: 25.4,25.4 ccw(c25.527,25.4) 25.654,25.4 ; 25.4,96.139 cw(c25.527,96.139) 25.527,96.266 ; 95.377,25.4 ccw(c95.377,25.527) 95.504,25.527 ; 95.377,96.266 cw(c95.377,96.139) 95.504,96.139 ; 25.4,24.638 95.504,24.638 95.504,96.647 25.4,96.647 25.4,24.638
Board Shape:
  lines w0.254: 25.527,25.4 25.527,96.139 95.377,96.139 95.377,25.527 25.654,25.527

## Text inside footprints (layer, text, board x,y; h text height)
SW1: Mechanical 13 "*" at 55.816,93.091 h1.27 r180
SW2: Mechanical 13 "*" at 66.667,93.091 h1.27 r180
SW3: Mechanical 13 "*" at 77.534,93.091 h1.27 r180
U2: Mechanical 13 "*" at 57.963,50.658 h1.27; Top Overlay "*" at 56.515,51.689 h1.27
U4: Top Overlay "*" at 52.261,67.294 h1.27
U5: Top Overlay "*" at 68.834,67.945 h1.27